# Altium PCB Export_PCB.PcbDoc (part 6 of 7)
Units mm, origin at the board's own origin, x right, y up, seen from the top; angles counter-clockwise.
Board outline 93 x 90 mm, 6 copper layers (Top_1, GND_2, SIGNAL_3, PWR_4, GND_5, Bottom_6), stack 1.606 mm thick; 470 components, 374 nets, 2145 pads, 1031 vias.
Unrouted connection lines stored in the file: 451.
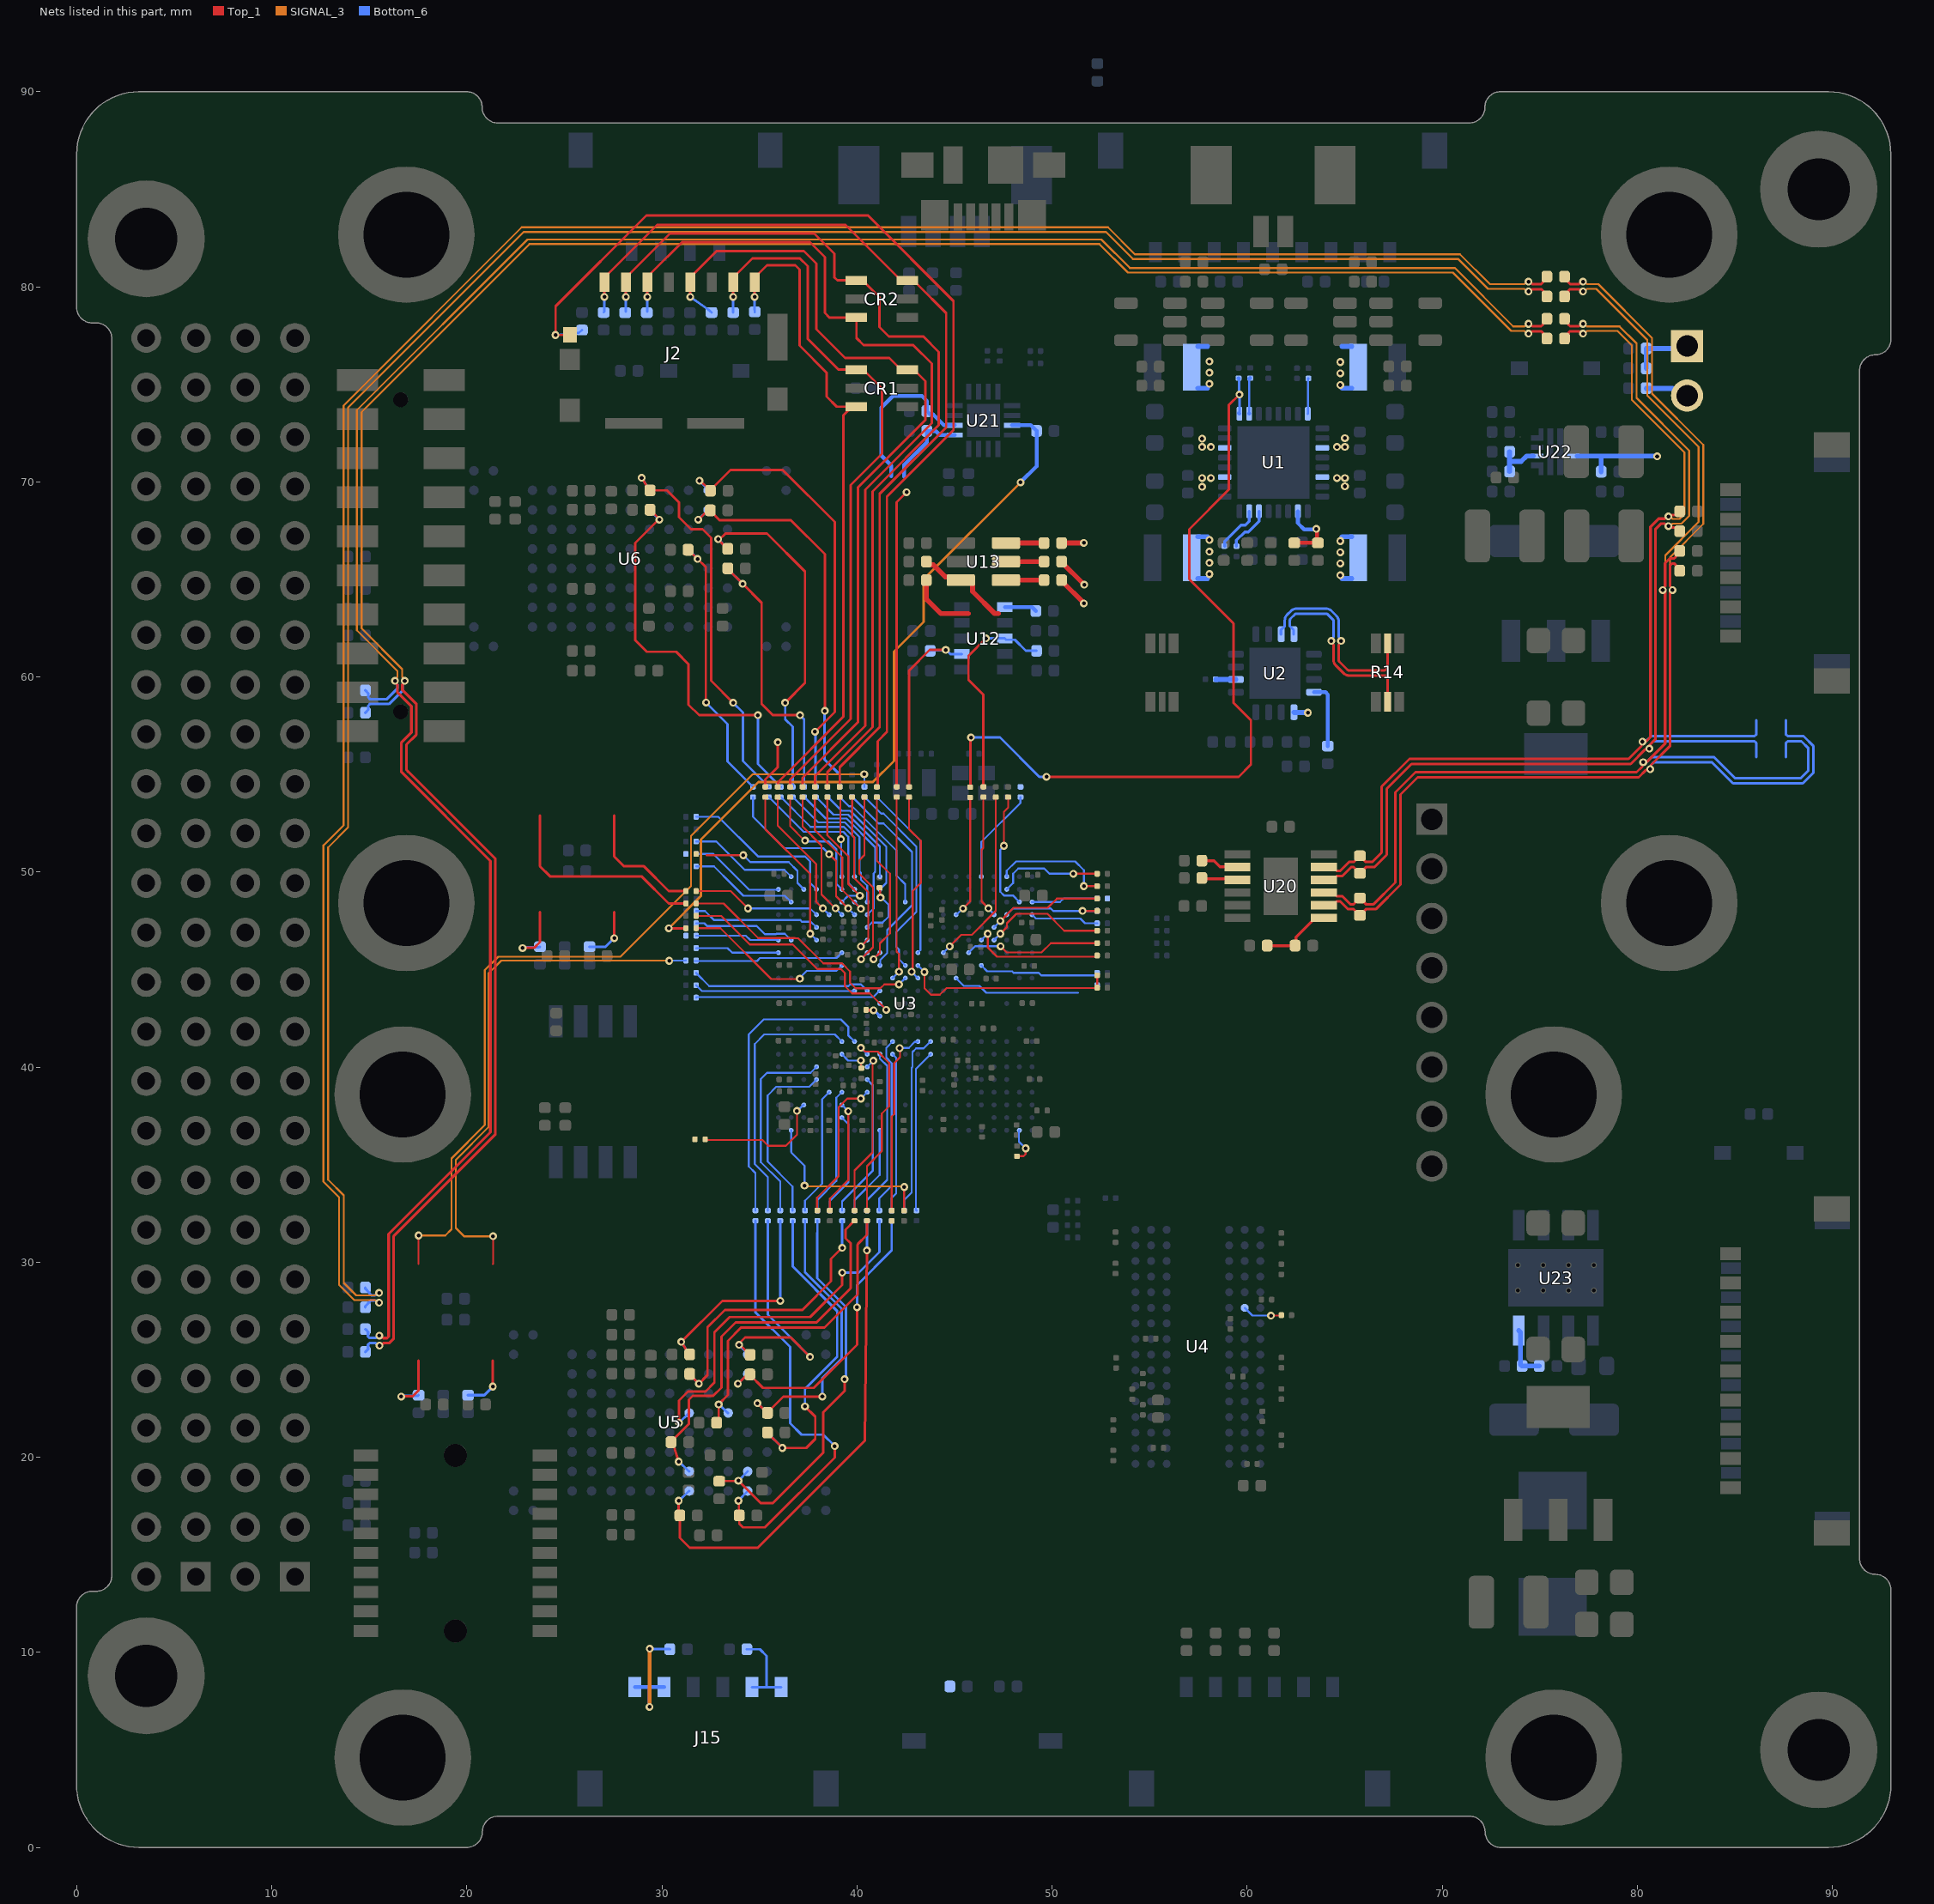
[diagram p8: the nets of this part, all layers, seen from the top]

## Via types
v1: diameter 0.4, hole 0.2, Top_1 to Bottom_6, 870 vias
v2: diameter 0.4, hole 0.2, Top_1 to Bottom_6, tented both sides, 160 vias
v3: diameter 0.4, hole 0.15, Top_1 to Bottom_6, 1 vias

## Nets (pads, with @x,y where several pads share a name; then routed paths per layer and width w, separated by ;. In a path a pad name is that pad's centre, name@x,y a point inside that pad or via, vN(x,y) a via of type N, cw(c..) or ccw(c..) an arc to the next point about the centre after c; other vN are vias at no path point) (continued)
NetJP3_1: JP3.1 R206.1 R208.1 | length 3.2
  Bottom_6 w0.254: R206.1@80.46,75.819 R208.1@80.46,76.835 82.427,76.835 JP3.1@82.554,76.962
NetJP3_2: JP3.2 R49.1 | length 2.2
  Bottom_6 w0.254: R49.1@80.46,74.794 81.805,74.794 82.176,74.422 JP3.2@82.554,74.422
NetL1_1: L1.1 U1.11 | length 1
  Bottom_6 w0.254: v2@64.873,74.795 L1.1@65.367,74.795 ; 64.873,76.941 L1.1@65.367,76.941
  other v2: 64.607,71.794 65.016,71.794 65.016,72.243 64.781,74.965 64.781,75.565 64.781,76.14
NetL2_1: L2.1 U1.14 | length 1
  Bottom_6 w0.254: v2@64.873,65.045 L2.1@65.367,65.045 ; 64.873,67.191 L2.1@65.367,67.191
  other v2: 64.781,65.215 64.781,65.815 64.781,66.39 64.781,66.965 65.016,69.772 64.607,70.196 65.016,70.196
NetL3_1: L3.1 U1.27 | length 1
  Bottom_6 w0.254: L3.1@57.479,65.045 57.972,65.045 ; L3.1@57.479,67.191 v2@57.972,67.191
  other v2: 58.065,65.272 58.065,65.847 58.065,66.422 58.065,67.022 57.696,69.743 57.696,70.193 58.146,70.193
NetL4_1: L4.1 U1.30 | length 1
  Bottom_6 w0.254: L4.1@57.479,74.795 57.972,74.795 ; L4.1@57.479,76.941 57.972,76.941
  other v2: 57.696,71.79 58.146,71.79 57.696,72.215 58.065,75.022 58.065,75.597 58.065,76.172
NetR1_2: R1.2 U1.22 | length 2.4
  Bottom_6 w0.15: R1.2@59.456,66.7 59.456,67.01 59.883,67.437 60.071,67.437 60.606,67.972 U1.22@60.606,68.493
NetR2_2: R2.2 U1.23 | length 2.4
  Bottom_6 w0.15: R2.2@58.842,66.703 58.848,66.71 58.848,66.95 59.688,67.789 59.915,67.789 60.106,67.98 U1.23@60.106,68.493
NetR3_2: R3.2 U1.8 | length 1.8
  Bottom_6 w0.127: U1.8@63.106,73.493 63.123,73.511 63.123,75.285 R3.2@63.141,75.303
NetR8_1: R8.1 R78.2 U1.1 | length 41.2
  Top_1 w0.127: R78.2@45.803,54.351 45.825,54.373 45.825,56.874 v1(45.847,56.896) ; v1(49.715,54.878) 59.565,54.878 60.198,55.511 60.198,57.785 59.309,58.674 59.309,62.738 57.035,65.012 57.035,67.578 59.055,69.597 59.055,73.924 v1(59.606,74.475)
  Bottom_6 w0.127: v1(45.847,56.896) 47.335,56.896 49.353,54.878 v1(49.715,54.878) ; U1.1@59.584,73.515 59.606,73.536 v1(59.606,74.475) 59.585,74.497 R8.1@59.585,75.289
  Bottom_6 w0.2: R8.1@59.563,75.311 R8.1@59.584,75.29 ; U1.1@59.584,73.515 U1.1@59.606,73.493
NetR9_1: R9.1 U2.16 | length 3.4
  Bottom_6 w0.2: U2.16@63.427,59.217 64.018,59.217 64.135,59.099 R9.1@64.135,56.457
NetR10_1: R74.2 U2.1 | length 0.7
  Bottom_6 w0.25: U2.1@62.402,58.192 62.414,58.179 63.106,58.179 v1(63.119,58.166)
NetR11_1: R11.1 U2.6 | length 1
  Bottom_6 w0.254: R11.1@58.393,59.867 U2.6@59.427,59.867
NetR12_1: R12.1 R13.2 U1.18 | length 3.6
  Top_1 w0.2: R13.2@62.42,66.871 62.583,66.871 63.464,66.871 R12.1@63.627,66.871 63.608,67.008 63.582,67.035 63.582,67.547 v1(63.544,67.585)
  Bottom_6 w0.2: U1.18@62.606,68.493 62.606,67.881 62.925,67.562 63.52,67.562 v1(63.544,67.585)
NetR21_1: R21.1 R22.2 U3.H10 | length 10.9
  Top_1 w0.1: v1(43.463,44.878) 43.463,44.042 43.797,43.708 44.247,43.708 44.595,44.055 52.177,44.055 ; R22.2@52.316,44.069 R21.1@52.316,44.704
  Bottom_6 w0.1: U3.H10@43.128,45.212 v1(43.463,44.878)
NetR67_2: R67.2 R169.2 | length 1.7
  Top_1 w0.254: R169.2@50.488,64.963 50.488,64.932 51.635,63.785 v1(51.635,63.768)
NetR87_2: R87.2 | length 27.7
  Top_1 w0.1: 21.336,29.902 21.347,29.913 v1(21.347,31.33)
  SIGNAL_3 w0.1: v1(21.347,31.33) 19.858,31.33 19.434,31.754 19.434,35.242 21.127,36.935 21.127,44.81 21.774,45.457 30.366,45.457 v1(30.375,45.449)
  Bottom_6 w0.1: v1(30.375,45.449) 30.383,45.458 31.225,45.458 R87.2@31.234,45.466
NetR88_2: R88.2 R207.1 U22.9 | length 4.9
  Bottom_6 w0.25: R207.1@78.154,70.521 78.154,71.304 78.171,71.32
  Bottom_6 w0.254: U22.9@76.917,71.32 78.171,71.32 81.008,71.32 v2(81.021,71.307)
NetR89_2: R89.2 | length 43.1
  Top_1 w0.1: 17.526,29.902 v1(17.526,31.369)
  SIGNAL_3 w0.1: v1(17.526,31.369) 18.896,31.369 19.22,31.693 19.22,35.323 20.927,37.03 20.927,44.971 21.614,45.657 27.877,45.657 31.496,49.276 31.496,51.857 34.653,55.013 v1(40.373,55.013)
  Bottom_6 w0.1: v1(40.373,55.013) 40.386,55 R89.2@40.386,54.364
NetR91_2: R91.2 | length 6.5
  Top_1 w0.134: 27.559,52.889 27.559,50.8 28.067,50.292 29.083,50.292 30.353,49.022 R91.2@31.234,49.022
NetR93_2: R93.2 | length 10.9
  Top_1 w0.134: 23.749,52.889 23.749,50.292 24.264,49.777 28.957,49.777 30.347,48.387 R93.2@31.234,48.387
NetR96_2: R96.2 R164.2 U12.3 | length 11.2
  Top_1 w0.125: R96.2@46.482,54.364 46.482,59.093 45.72,59.855 45.72,61.087 v1(46.609,61.976)
  Bottom_6 w0.125: v1(46.609,61.976) U12.3@47.582,61.976 47.65,61.908 48.096,61.908 48.663,61.341 R164.2@49.207,61.341
NetR98_2: R98.2 R197.1 U21.15 | length 39
  Top_1 w0.125: v1(30.353,47.117) R98.2@31.234,47.117
  SIGNAL_3 w0.125: v1(30.353,47.117) 32.004,48.768 32.004,51.67 34.944,54.61 40.815,54.61 41.901,55.696 41.901,61.294 43.42,62.813 43.42,65.01 v1(48.387,69.977)
  Bottom_6 w0.2: U21.15@47.952,72.902 48.914,72.902 49.03,72.785 49.035,72.785 49.207,72.613 R197.1@49.207,72.608 49.207,70.797 v1(48.387,69.977)
NetR99_2: R99.2 R198.2 U21.6 | length 11.2
  Top_1 w0.125: R99.2@35.306,54.364 35.306,54.737 35.941,55.372 v1(35.941,56.655)
  Bottom_6 w0.2: 41.758,70.282 41.758,70.841 41.255,71.344 41.255,73.803 41.848,74.397 43.332,74.397 43.582,74.147 R198.2@43.582,73.625 43.582,73.62 43.754,73.448 43.914,73.448 44.454,72.908 45.006,72.908 U21.6@45.012,72.902
NetR100_2: R100.2 R199.2 U21.5 | length 19.6
  Top_1 w0.125: R100.2@42.037,54.364 42.037,68.961 v1(42.545,69.469)
  Bottom_6 w0.2: 42.423,70.269 42.423,70.871 43.582,72.03 R199.2@43.582,72.609 43.586,72.605 44.04,72.605 44.243,72.402 U21.5@45.012,72.402
NetR111_1: R111.1 U3.B19 | length 6.1
  Top_1 w0.1: 32.301,50.862 v1(34.178,50.862)
  Bottom_6 w0.1: v1(34.178,50.862) 34.528,50.512 36.503,50.512 36.953,50.062 36.953,49.437 U3.B19@37.278,49.112
NetR113_1: R113.1 U3.F20 | length 5.2
  Bottom_6 w0.1: R113.1@31.758,47.371 32.178,47.371 32.312,47.237 34.853,47.237 35.278,46.812 35.853,46.812 35.876,46.835 36.305,46.835 U3.F20@36.628,46.512
NetR125_2: R125.2 R165.2 U12.7 | length 10
  Top_1 w0.125: R125.2@42.672,54.364 42.672,60.325 43.731,61.384 v1(44.552,61.384)
  Bottom_6 w0.125: R165.2@43.757,61.341 43.779,61.363 44.53,61.363 v1(44.552,61.384) 44.586,61.384 44.794,61.176 U12.7@45.382,61.176
NetR126_2: R126.2 R168.2 | length 1.7
  Top_1 w0.254: R168.2@50.488,65.913 50.488,65.892 51.65,64.73 v1(51.654,64.73)
NetR128_1: R128.1 U3.AA2 | length 1.8
  Top_1 w0.1: R128.1@48.228,35.437 48.541,35.437 48.646,35.542 48.646,35.828 v1(48.651,35.833)
  Bottom_6 w0.1: U3.AA2@48.328,36.762 48.303,36.737 48.303,36.181 v1(48.651,35.833)
NetR131_2: R131.2 U4.L8 | length 2.1
  Top_1 w0.1: v1(61.226,27.262) 61.687,27.262 R131.2@61.756,27.283
  Bottom_6 w0.1: U4.L8@59.878,27.662 60.278,27.262 v1(61.226,27.262) v1@61.278,27.262
NetR161_1: 
NetR162_1: 
NetR163_1: 
NetR166_2: R166.2 U12.1 | length 1.7
  Bottom_6 w0.2: U12.1@47.582,63.576 48.976,63.576 49.168,63.383 R166.2@49.168,63.379
NetR167_1: R167.1 U13.6 | length 2
  Top_1 w0.254: U13.6@47.637,66.863 R167.1@49.588,66.863
NetR168_1: R168.1 U13.5 | length 2
  Top_1 w0.254: U13.5@47.637,65.913 R168.1@49.588,65.913
NetR169_1: R169.1 U13.4 | length 2
  Top_1 w0.254: U13.4@47.637,64.963 R169.1@49.588,64.963
NetR170_1: R170.1 SB1.1 | length 3.4
  Top_1 w0.254: R170.1@43.561,64.958 43.561,63.989 44.304,63.246 SB1.1@45.707,63.246
NetR171_1: R171.1 SB1.2 U13.3 | length 5
  Top_1 w0.254: R171.1@43.561,65.913 43.561,65.894 43.708,65.746 43.919,65.746 44.534,65.131 45.159,65.131 U13.3@45.327,64.963 45.757,64.963 45.925,64.795 45.925,64.387 47.066,63.246 SB1.2@47.244,63.246
NetR179_2: R179.2 | length 3.5
  Top_1 w0.134: v1(16.637,23.114) 16.651,23.128 17.233,23.128 17.526,23.422 17.526,24.962
  Bottom_6 w0.134: v1(16.637,23.114) 16.672,23.149 17.491,23.149 R179.2@17.526,23.183
NetR181_1: R181.1 | length 2.8
  Top_1 w0.134: v1(21.336,23.622) 21.336,24.962
  Bottom_6 w0.134: R181.1@20.066,23.183 20.897,23.183 v1(21.336,23.622)
NetR185_2: R185.2 | length 3.5
  Top_1 w0.134: v1(22.86,46.101) 22.874,46.115 23.456,46.115 23.749,46.409 23.749,47.949
  Bottom_6 w0.134: v1(22.86,46.101) 22.895,46.136 23.714,46.136 R185.2@23.749,46.17
NetR187_1: R187.1 | length 2.8
  Top_1 w0.134: v1(27.559,46.609) 27.559,47.949
  Bottom_6 w0.134: R187.1@26.289,46.17 27.12,46.17 v1(27.559,46.609)
NetR191_1: R191.1 R193.1 U20.7 | length 3.7
  Top_1 w0.15: R193.1@61.029,46.228 R191.1@62.459,46.228 62.502,46.271 62.502,46.665 63.487,47.65 U20.7@63.938,47.65
NetR203_2: R203.2 R204.1 U22.2 | length 2.4
  Bottom_6 w0.254: R203.2@73.454,70.53 73.454,71.045 ; R204.1@73.454,71.545 73.454,71.045 ; U22.2@74.674,71.323 74.596,71.323 74.594,71.326 74.326,71.326 74.045,71.045 73.454,71.045
NetR210_2: R210.2 R211.1 U23.4 | length 2.8
  Bottom_6 w0.254: U23.4@73.924,26.495 74.01,26.41 74.01,24.767 R210.2@74.095,24.681 R211.1@74.973,24.681
NRST: C29.1 R7.1 R18.2 R167.2 R188.2 U1.2 U3.D3 | length 8.6
  Top_1 w0.1: v1(51.562,48.006) C29.1@52.316,48.006
  Top_1 w0.254: R167.2@50.488,66.863 50.494,66.869 51.622,66.869 v1(51.628,66.876)
  Bottom_6 w0.1: U3.D3@47.678,47.812 48,48.134 49.936,48.134 50.064,48.006 v1(51.562,48.006) R18.2@52.316,48.006
  Bottom_6 w0.127: U1.2@60.11,73.497 R7.1@60.11,75.279
  Bottom_6 w0.2: U1.2@60.106,73.493 U1.2@60.11,73.497 ; R7.1@60.11,75.279 60.147,75.317 R7.1@60.16,75.317
NRST_OUT: R19.2 U3.E4 | length 5.9
  Top_1 w0.1: v1(47.353,47.487) 48.031,48.165 49.781,48.165 50.257,48.641 R19.2@52.316,48.641
  Bottom_6 w0.1: U3.E4@47.028,47.162 v1(47.353,47.487)
PA0: R31.1 U3.U18 | length 9.3
  Bottom_6 w0.1: R31.1@36.703,32.647 36.703,33.879 35.418,35.163 35.418,38.541 35.866,38.989 37.555,38.989 U3.U18@37.928,39.362
PA1: R32.1 U3.V17 | length 6.6
  Bottom_6 w0.1: R32.1@37.338,32.647 37.338,33.147 38.221,34.03 38.221,38.355 U3.V17@38.578,38.712
PA2: R34.1 U3.R14 | length 10.3
  Top_1 w0.1: v1(40.203,40.987) 40.218,40.987 40.412,40.794 41.066,40.794 41.649,40.211 41.649,37.994 41.275,37.619 41.275,35.687 40.513,34.925 R34.1@40.513,32.647
  Bottom_6 w0.1: v1(40.203,40.987) U3.R14@40.528,40.662
PA3: R35.1 U3.T18 | length 10.3
  Bottom_6 w0.1: R35.1@36.068,32.647 36.068,34.138 35.075,35.131 35.075,39.391 35.391,39.707 37.623,39.707 U3.T18@37.928,40.012
PA4: R37.1 U3.P16 | length 13.6
  Bottom_6 w0.1: R37.1@35.433,32.647 35.433,34.36 34.761,35.031 34.761,41.185 35.251,41.674 38.866,41.674 U3.P16@39.228,41.312
PA5: R38.1 U3.V16 | length 6.6
  Bottom_6 w0.1: R38.1@37.973,32.647 37.973,33.184 38.946,34.157 38.946,38.43 U3.V16@39.228,38.712
PA6: R39.1 U3.T14 | length 8.5
  Top_1 w0.1: R39.1@39.878,32.647 39.878,34.701 40.802,35.625 40.802,40.286 v1(40.844,40.328)
  Bottom_6 w0.1: U3.T14@40.528,40.012 v1(40.844,40.328)
PA7: R41.1 U3.P15 | length 15.6
  Bottom_6 w0.1: R41.1@34.798,32.647 34.798,34.569 34.454,34.913 34.454,41.675 35.222,42.443 39.178,42.443 39.553,42.068 39.553,41.637 U3.P15@39.878,41.312
PA8: R44.1 U3.R13 | length 8.6
  Bottom_6 w0.1: R44.1@40.513,32.647 40.513,33.183 41.551,34.221 41.551,40.064 41.178,40.437 U3.R13@41.178,40.662
PA9: R46.1 U3.U14 | length 7.5
  Bottom_6 w0.1: R46.1@39.243,32.647 39.243,33.119 40.807,34.682 40.807,39.083 U3.U14@40.528,39.362
PA10: R48.1 U3.R12 | length 8.2
  Bottom_6 w0.1: R48.1@41.783,32.647 41.783,33.296 42.015,33.528 42.015,40.475 U3.R12@41.828,40.662
PA11: R50.1 U3.P12 | length 9.2
  Bottom_6 w0.1: R50.1@41.148,32.647 41.148,33.272 41.785,33.909 41.785,40.205 41.503,40.487 41.503,40.987 U3.P12@41.828,41.312
PA14: R55.1 U3.V14 | length 7.6
  Top_1 w0.1: R55.1@37.973,32.647 37.948,32.673 37.948,33.299 39.065,34.417 39.065,37.944 39.508,38.387 v1(40.203,38.387)
  Bottom_6 w0.1: v1(40.203,38.387) U3.V14@40.528,38.712
PA17: R56.1 U3.R9 | length 8.3
  Bottom_6 w0.1: R56.1@43.053,32.647 43.02,32.681 43.02,39.904 U3.R9@43.778,40.662
PA18: R58.1 U3.W16 | length 5.9
  Top_1 w0.1: R58.1@38.608,32.647 38.608,33.265 39.553,34.21 v1(39.553,37.737)
  Bottom_6 w0.1: U3.W16@39.228,38.062 v1(39.553,37.737)
PA21: R59.1 U3.W19 | length 6.8
  Top_1 w0.1: R59.1@32.222,36.3 32.26,36.262 35.153,36.262 35.444,35.971 36.357,35.971 36.927,36.541 36.927,37.75 v1(36.923,37.755)
  Bottom_6 w0.1: v1(36.923,37.755) 36.947,37.755 37.254,38.062 U3.W19@37.278,38.062
PA22: R61.1 U3.P10 | length 9.6
  Top_1 w0.1: R61.1@41.783,32.639 41.783,37.465 41.911,37.593 41.911,40.206 42.211,40.506 42.211,40.948 v1(42.187,40.972)
  Bottom_6 w0.1: v1(42.187,40.972) 42.198,40.983 42.656,40.983 42.962,41.289 43.105,41.289 U3.P10@43.128,41.312
PA23: R63.1 U3.AA20 | length 9.5
  Top_1 w0.1: R63.1@42.418,32.639 42.42,32.641 42.42,33.853 v1(42.422,33.856)
  SIGNAL_3 w0.1: v1(37.315,33.924) 37.349,33.89 42.388,33.89 v1(42.422,33.856)
  Bottom_6 w0.1: U3.AA20@36.628,36.762 36.628,35.676 ccw(c36.728,35.676) 36.657,35.606 37.32,34.943 37.32,33.929 v1(37.315,33.924)
PA24: R65.1 U3.P9 | length 9.4
  Bottom_6 w0.1: R65.1@42.418,32.647 42.418,33.189 42.799,33.57 42.799,39.963 42.848,40.012 42.848,40.771 43.039,40.962 43.419,40.962 U3.P9@43.769,41.312
PA25: R67.1 U3.B21 | length 5
  Bottom_6 w0.1: R67.1@31.758,50.927 32.638,50.927 34.478,49.087 35.953,49.087 U3.B21@35.978,49.112
PA26: R69.1 U3.K14 | length 9.2
  Bottom_6 w0.1: R69.1@31.758,44.831 31.758,44.819 32.431,44.146 39.562,44.146 39.653,44.237 40.203,44.237 U3.K14@40.528,43.912
PA28: R72.1 U3.L13 | length 12.6
  Top_1 w0.1: R72.1@31.758,47.752 33.041,47.752 34.51,46.282 36.712,46.282 37.967,45.027 39.174,45.027 39.385,44.816 39.385,44.149 39.753,43.781 40.659,43.781 v1(41.503,42.937)
  Bottom_6 w0.1: U3.L13@41.178,43.262 v1(41.503,42.937)
PA30: R73.1 U3.K15 | length 8.3
  Bottom_6 w0.1: R73.1@31.758,44.196 31.758,44.194 31.845,44.108 31.847,44.108 32.06,43.895 39.861,43.895 U3.K15@39.878,43.912
PA31: R74.1 U3.F21 | length 4.3
  Bottom_6 w0.1: R74.1@31.758,46.736 34.304,46.736 34.528,46.512 U3.F21@35.978,46.512
PB1: R33.1 U3.G21 | length 4.3
  Bottom_6 w0.1: R33.1@31.758,46.101 33.364,46.101 33.603,45.862 U3.G21@35.978,45.862
PB6: R40.1 U3.K13 | length 9.6
  Bottom_6 w0.1: R40.1@31.758,43.561 31.786,43.589 40.831,43.589 41.154,43.912 U3.K13@41.178,43.912
PB7: R42.1 U3.C20 | length 5.6
  Bottom_6 w0.1: R42.1@31.758,50.292 32.673,50.292 33.158,49.807 33.216,49.749 34.178,48.787 36.303,48.787 U3.C20@36.628,48.462
PB21: R60.1 U3.D15 | length 9.4
  Top_1 w0.1: v1(38.578,50.912) 38.928,50.562 38.928,48.762 v1(39.553,48.137)
  Bottom_6 w0.1: R60.1@34.671,53.84 34.671,52.848 34.665,52.842 36.285,51.222 38.268,51.222 v1(38.578,50.912) ; v1(39.553,48.137) U3.D15@39.878,47.812
PB22: R62.1 U3.C14 | length 7.8
  Bottom_6 w0.1: R62.1@36.703,53.84 36.716,53.84 38.015,52.54 39.384,52.54 40.132,51.792 40.132,50.043 40.212,49.963 40.212,49.61 40.528,49.294 U3.C14@40.528,48.462
PB23: R64.1 U3.D14 | length 8.3
  Bottom_6 w0.1: R64.1@37.293,53.84 37.306,53.84 38.405,52.74 39.467,52.74 40.935,51.273 40.935,50.009 40.853,49.928 40.853,48.137 U3.D14@40.528,47.812
PB24: R66.1 U3.B15 | length 7.8
  Bottom_6 w0.1: R66.1@35.474,53.843 35.486,53.843 37.272,52.057 39.302,52.057 39.553,51.806 39.553,49.437 U3.B15@39.878,49.112
PB25: R68.1 U3.A13 | length 5.9
  Bottom_6 w0.1: R68.1@37.893,53.84 37.906,53.84 38.805,52.94 39.55,52.94 41.178,51.312 U3.A13@41.178,49.762
PB26: R70.1 U3.A15 | length 6.6
  Bottom_6 w0.1: R70.1@36.093,53.838 36.105,53.838 37.626,52.316 39.325,52.316 39.878,51.764 U3.A15@39.878,49.762
PB27: R71.1 U3.C11 | length 6.9
  Bottom_6 w0.1: R71.1@39.116,53.848 39.118,53.848 39.216,53.75 39.216,53.748 39.596,53.368 39.758,53.368 42.026,51.101 42.026,49.825 42.478,49.373 U3.C11@42.478,48.462
PC2: R78.1 U3.D7 | length 6.3
  Top_1 w0.1: v1(45.435,48.128) 45.803,48.496 R78.1@45.803,53.826
  Bottom_6 w0.1: U3.D7@45.078,47.812 45.099,47.812 45.414,48.128 v1(45.435,48.128)
PC3: R80.1 U3.G8 | length 9.4
  Top_1 w0.1: v1(44.753,46.187) 45.348,46.782 45.89,46.782 47.117,48.008 R80.1@47.117,53.84
  Bottom_6 w0.1: U3.G8@44.428,45.862 v1(44.753,46.187)
PC4: R82.1 U3.C2 | length 6.2
  Top_1 w0.1: v1(47.533,51.346) 47.533,53.086 47.752,53.304 R82.1@47.752,53.84
  Bottom_6 w0.1: v1(47.533,51.346) 47.533,51.325 47.345,51.138 47.345,48.986 47.532,48.799 47.991,48.799 U3.C2@48.328,48.462
PC11: R88.1 U3.C1 | length 3.4
  Bottom_6 w0.1: U3.C1@48.978,48.462 50.41,48.462 50.589,48.641 R88.1@52.316,48.641
PC12: R90.1 U3.H5 | length 6.2
  Bottom_6 w0.1: U3.H5@46.378,45.212 46.678,44.912 47.958,44.912 48.033,44.837 49.314,44.837 49.447,44.704 R90.1@52.324,44.704
PC13: R92.1 U3.D1 | length 3.5
  Bottom_6 w0.1: U3.D1@48.978,47.812 49.178,47.612 51.448,47.612 51.689,47.371 R92.1@52.315,47.371
PC14: R94.1 U3.J7 | length 6.6
  Bottom_6 w0.1: U3.J7@45.078,44.562 45.474,44.166 46.274,44.166 46.628,43.812 51.336,43.812
PC17: R96.1 U3.D4 | length 6.3
  Top_1 w0.1: R96.1@46.482,53.84 46.482,51.236 46.386,51.14 46.386,48.493 v1(46.743,48.137)
  Bottom_6 w0.1: v1(46.743,48.137) 46.743,48.117 47.028,47.832 U3.D4@47.028,47.812
PC22: R101.1 U3.F4 | length 6.3
  Top_1 w0.1: v1(47.353,46.837) 47.693,47.177 47.693,47.377 48.17,47.854 49.762,47.854 50.626,46.99 R101.1@52.316,46.99
  Bottom_6 w0.1: U3.F4@47.028,46.512 v1(47.353,46.837)
PC23: R102.1 U3.A3 | length 6.1
  Top_1 w0.1: v1(51.634,49.279) 51.635,49.277 52.304,49.277 R102.1@52.309,49.282
  Bottom_6 w0.1: U3.A3@47.678,49.762 47.678,50.065 48.159,50.546 51.181,50.546 51.634,50.093 v1(51.634,49.279)
PC24: R103.1 U3.F5 | length 7
  Top_1 w0.1: v1(46.703,46.837) 46.703,46.139 47.182,45.66 52.256,45.66 R103.1@52.316,45.72
  Bottom_6 w0.1: U3.F5@46.378,46.512 v1(46.703,46.837)
PC25: R104.1 U3.B3 | length 5.5
  Top_1 w0.1: v1(51.092,49.911) R104.1@52.316,49.911
  Bottom_6 w0.1: U3.B3@47.678,49.112 48.003,49.437 48.003,49.915 48.271,50.184 49.597,50.184 49.869,49.911 v1(51.092,49.911)
PC26: R105.1 U3.G6 | length 7.1
  Top_1 w0.1: v1(47.361,46.193) 47.676,45.878 49.463,45.878 49.939,46.354 R105.1@52.315,46.355
  Bottom_6 w0.1: U3.G6@45.728,45.862 46.059,46.193 v1(47.361,46.193)
PC27: R106.1 U3.C15 | length 7.2
  Top_1 w0.1: R106.1@37.846,53.84 37.846,52.147 39.247,50.746 39.247,49.075 v1(40.202,48.12)
  Bottom_6 w0.1: U3.C15@39.878,48.462 39.878,48.453 40.202,48.129 v1(40.202,48.12)
PC28: R107.1 U3.D16 | length 6.9
  Top_1 w0.1: R107.1@37.211,53.84 37.211,52.332 38.188,51.355 38.188,48.852 v1(38.903,48.137)
  Bottom_6 w0.1: v1(38.903,48.137) U3.D16@39.228,47.812
PC29: R108.1 U3.B16 | length 6.5
  Top_1 w0.1: R108.1@36.576,53.84 36.576,52.357 37.319,51.614 v1(37.34,51.614)
  Bottom_6 w0.1: v1(37.34,51.614) 37.385,51.568 38.553,51.568 38.94,51.181 38.94,49.4 U3.B16@39.228,49.112
PC30: R110.1 U3.D17 | length 7.1
  Top_1 w0.1: R110.1@35.941,53.84 35.941,52.379 37.912,50.408 37.912,48.478 v1(38.253,48.137)
  Bottom_6 w0.1: v1(38.253,48.137) U3.D17@38.578,47.812
PC31: R112.1 U3.A16 | length 4.1
  Top_1 w0.1: R112.1@39.116,53.84 39.148,53.808 39.148,51.716 v1(39.18,51.684)
  Bottom_6 w0.1: v1(39.18,51.684) 39.2,51.664 39.2,49.79 U3.A16@39.228,49.762
PD0: R76.1 U3.C16 | length 6.8
  Top_1 w0.1: R76.1@38.481,53.84 38.481,51.882 39.564,50.799 39.564,49.375 v1(40.152,48.787)
  Bottom_6 w0.1: U3.C16@39.228,48.462 39.553,48.787 v1(40.152,48.787)
PD2: R79.1 U3.G13 | length 9.4
  Top_1 w0.1: v1(40.851,45.533) 41.176,45.858 41.176,46.338 41.692,46.854 41.692,49.91 41.021,50.581 R79.1@41.021,53.84
  Bottom_6 w0.1: v1@40.851,45.534 U3.G13@41.178,45.862
PD3: R81.1 U3.B18 | length 8.4
  Bottom_6 w0.1: R81.1@31.758,52.832 32.893,52.832 34.924,50.801 37.339,50.801 37.603,50.537 37.603,49.437 U3.B18@37.928,49.112
PD6: R83.1 U3.G10 | length 9
  Bottom_6 w0.1: R83.1@41.021,53.84 41.023,53.84 41.121,53.742 41.121,53.74 43.255,51.605 43.255,45.996 43.128,45.868 U3.G10@43.128,45.862
PD7: R84.1 U3.A20 | length 5.6
  Bottom_6 w0.1: R84.1@31.758,51.562 32.796,51.562 34.246,50.112 36.278,50.112 U3.A20@36.628,49.762
PD8: R85.1 U3.G14 | length 9.4
  Top_1 w0.1: v1(40.213,45.533) 40.82,46.14 40.82,49.216 40.12,49.915 40.12,50.602 40.386,50.868 R85.1@40.386,53.84
  Bottom_6 w0.1: v1(40.213,45.533) 40.213,45.54 40.528,45.855 U3.G14@40.528,45.862
PD9: R86.1 U3.F14 | length 8.6
  Top_1 w0.1: R86.1@39.751,53.848 39.751,51.875 39.854,51.772 39.854,49.7 40.585,48.969 40.585,46.569 v1(40.203,46.187)
  Bottom_6 w0.1: v1(40.203,46.187) U3.F14@40.528,46.512
PD10: R87.1 U3.G16 | length 7.7
  Bottom_6 w0.1: R87.1@31.68,45.441 34.882,45.441 35.027,45.587 38.953,45.587 U3.G16@39.228,45.862
PD11: R89.1 U3.H11 | length 10.4
  Bottom_6 w0.1: R89.1@40.386,53.84 40.399,53.84 41.247,52.991 41.362,52.991 43.048,51.305 43.048,47.954 42.016,46.921 42.016,46.174 42.153,46.037 42.153,45.537 U3.H11@42.478,45.212
PD12: R91.1 U3.D18 | length 6.7
  Top_1 w0.1: R91.1@31.758,49.022 33.528,49.022 v1(34.417,48.133)
  Bottom_6 w0.1: v1(34.417,48.133) 34.421,48.137 37.603,48.137 U3.D18@37.928,47.812
PD13: R93.1 U3.J11 | length 13.1
  Top_1 w0.1: R93.1@31.758,48.387 33.164,48.387 34.936,46.615 36.824,46.615 36.83,46.609 36.985,46.609 38.281,45.313 39.237,45.313 39.648,44.902 39.648,44.325 39.936,44.036 41.201,44.036 41.402,44.237 v1(42.153,44.237)
  Bottom_6 w0.1: v1(42.153,44.237) U3.J11@42.478,44.562
PD16: R95.1 U3.E18 | length 6.5
  Bottom_6 w0.1: R95.1@31.758,48.006 32.209,48.006 32.682,47.533 37.107,47.533 37.188,47.452 37.638,47.452 U3.E18@37.928,47.162
PD17: R97.1 U3.H13 | length 10.7
  Bottom_6 w0.1: R97.1@39.751,53.84 39.764,53.84 41.113,52.49 41.361,52.49 42.828,51.024 42.828,48.297 41.554,47.023 41.554,45.977 41.553,45.976 41.553,45.848 41.201,45.496 41.201,45.235 U3.H13@41.178,45.212
PD18: R98.1 U3.H16 | length 8.9
  Top_1 w0.1: R98.1@31.758,47.117 33.006,47.117 35.611,44.512 37.053,44.512 v1(37.074,44.533)
  Bottom_6 w0.1: v1(37.074,44.533) 37.074,44.578 37.426,44.93 38.946,44.93 U3.H16@39.228,45.212
PD19: R99.1 U3.F18 | length 8.4
  Top_1 w0.1: R99.1@35.306,53.84 35.306,52.197 37.603,49.9 v1(37.603,46.837) v1@37.596,46.837
  Bottom_6 w0.1: v1(37.603,46.837) U3.F18@37.928,46.512
PD20: R100.1 U3.J12 | length 9.5
  Top_1 w0.1: R100.1@42.037,53.84 42.037,45.922 42.153,45.806 v1(42.153,44.887)
  Bottom_6 w0.1: U3.J12@41.828,44.562 v1(42.153,44.887)
PE4: R121.1 U3.AA13 | length 4.7
  Bottom_6 w0.1: R121.1@39.878,32.647 39.878,33.186 41.166,34.473 41.166,36.749 U3.AA13@41.178,36.762
PE9: R123.1 U3.Y16 | length 5.3
  Bottom_6 w0.1: R123.1@38.608,32.647 38.608,33.139 39.553,34.084 39.553,37.087 U3.Y16@39.228,37.412
PIOBU0: R125.1 U3.J10 | length 9.9
  Top_1 w0.1: R125.1@42.672,53.84 42.672,52.197 43.275,51.594 43.275,49.437 42.86,49.023 42.86,45.096 42.86,44.944 v1(42.803,44.887)
  Bottom_6 w0.1: v1(42.803,44.887) U3.J10@43.128,44.562
PIOBU1: R126.1 U3.A5 | length 4.9
  Bottom_6 w0.1: U3.A5@46.378,49.762 46.378,51.541 48.387,53.55 R126.1@48.387,53.84
QSPI0_CAL: R23.2 U3.M13 | length 0.8
  Top_1 w0.15: R23.2@40.465,42.937 40.48,42.923 40.843,42.923 v1(40.853,42.912)
  Bottom_6 w0.15: v1(40.853,42.912) 40.878,42.912 U3.M13@41.178,42.612
RS422_DE: R61.2 R196.2 U20.3 | length 1.9
  Top_1 w0.15: R196.2@57.679,49.692 57.725,49.647 59.46,49.647 U20.3@59.506,49.601
RS422_R\E\: R59.2 R192.1 U20.2 | length 2
  Top_1 w0.15: R192.1@57.679,50.581 58.3,50.581 58.614,50.267 59.411,50.267 59.436,50.292 59.477,50.251 U20.2@59.506,50.251
RS_422_2_PC104_RX_N: R177.1 R217.1 R224.1 | length 123.6
  Top_1 w0.134: 15.717,26.11 15.915,26.11 15.995,26.19 15.995,31.449 21.209,36.663 21.209,50.568 16.65,55.127 16.65,56.642 17.162,57.154 17.162,58.498 16.439,59.221 16.439,59.608 16.319,59.727 v1(16.319,59.799) ; v1(74.422,78.101) 74.494,78.101 74.613,77.982 75.082,77.982 75.161,78.06 75.161,78.088 75.369,78.296 R177.1@75.369,78.359
  SIGNAL_3 w0.1: v1(16.319,59.799) 16.319,59.877 16.449,60.007 16.449,60.305 14.365,62.389 14.365,73.675 23.116,82.426 52.534,82.426 53.995,80.965 70.643,80.965 73.637,77.971 74.213,77.971 74.343,78.101 v1(74.422,78.101)
  Bottom_6 w0.134: R217.1@14.801,26.565 14.938,26.428 14.938,26.192 15.017,26.113 15.327,26.113 15.449,26.235 v1(15.521,26.235) ; R224.1@14.801,59.309 14.949,59.161 14.949,58.947 15.028,58.868 15.908,58.868 16.439,59.399 16.439,59.608
RS_422_2_PC104_RX_P: R182.1 R216.1 R225.2 | length 124.3
  Top_1 w0.134: v1(15.53,25.725) 15.581,25.776 15.653,25.776 15.726,25.849 16.024,25.849 16.256,26.082 16.256,31.34 21.47,36.555 21.47,50.676 17.081,55.065 16.99,55.157 16.911,55.235 16.911,56.534 17.423,57.046 17.423,58.606 16.7,59.329 16.7,59.608 16.819,59.727 v1(16.819,59.799) ; v1(74.422,77.601) 74.494,77.601 74.613,77.72 75.082,77.72 75.161,77.642 75.161,77.614 75.369,77.406 R182.1@75.369,77.343
  SIGNAL_3 w0.1: v1(16.819,59.799) 16.819,59.877 16.689,60.007 16.689,60.404 14.605,62.488 14.605,73.575 23.215,82.186 52.434,82.186 53.895,80.725 70.543,80.725 73.537,77.731 74.213,77.731 74.343,77.601 v1(74.422,77.601)
  Bottom_6 w0.134: R216.1@14.801,25.4 14.938,25.537 14.938,25.773 15.017,25.852 15.331,25.852 15.458,25.725 v1(15.53,25.725) ; R225.2@14.801,58.166 14.949,58.314 14.949,58.528 15.028,58.607 16.016,58.607 16.7,59.291 16.7,59.608
RS_422_2_PC104_TX_N: R176.1 R219.1 | length 115.4
  Top_1 w0.134: v1(74.422,79.76) 74.494,79.76 74.613,79.879 75.082,79.879 75.161,79.801 75.161,79.773 75.369,79.565 R176.1@75.369,79.502
  SIGNAL_3 w0.1: v1(15.503,28.424) 15.422,28.424 15.292,28.294 14.336,28.294 13.695,28.935 13.695,33.422 12.888,34.229 12.888,51.262 13.921,52.295 13.921,73.813 22.916,82.808 52.767,82.808 54.147,81.427 70.814,81.427 72.351,79.89 74.213,79.89 74.343,79.76 v1(74.422,79.76)
  Bottom_6 w0.134: R219.1@14.801,28.702 14.801,28.639 15.009,28.431 15.009,28.403 15.107,28.305 15.312,28.305 15.431,28.424 v1(15.503,28.424)
RS_422_2_PC104_TX_P: R120.1 R218.1 | length 116.2
  Top_1 w0.134: v1(74.422,80.26) 74.494,80.26 74.613,80.141 75.082,80.141 75.161,80.219 75.161,80.247 75.369,80.455 R120.1@75.369,80.518
  SIGNAL_3 w0.1: v1(15.503,27.924) 15.424,27.924 15.294,28.054 14.237,28.054 13.455,28.836 13.455,33.322 12.648,34.13 12.648,51.362 13.681,52.395 13.681,73.912 22.816,83.048 52.866,83.048 54.247,81.667 70.913,81.667 72.45,80.13 74.213,80.13 74.343,80.26 v1(74.422,80.26)
  Bottom_6 w0.134: R218.1@14.801,27.686 14.801,27.749 15.009,27.957 15.009,27.965 15.088,28.044 15.312,28.044 15.431,27.924 v1(15.503,27.924)
RS_422_RX_N: R77.1 R177.2 R194.2 SB4.1 U20.10 | length 55.8
  Top_1 w0.134: U20.10@63.938,49.601 64.389,49.601 64.584,49.796 64.881,49.796 65.335,50.25 65.469,50.25 R194.2@65.78,49.938 ; R194.2@65.78,49.93 R194.2@65.78,49.938 ; R177.2@76.269,78.359 76.269,78.296 76.477,78.088 76.477,78.06 76.556,77.982 77.025,77.982 77.144,78.101 v1(77.216,78.101) ; 80.398,56.277 79.661,55.539 68.43,55.539 67.157,54.267 67.157,50.889 66.518,50.25 66.092,50.25 R194.2@65.78,49.938 ; v1@80.533,56.412 80.94,56.818 80.94,67.588 81.201,67.85 81.41,67.85 ; v1@81.741,67.662 81.99,67.662 R77.1@82.179,67.472
  SIGNAL_3 w0.1: v1(77.216,78.101) 77.295,78.101 77.425,77.971 79.089,77.971 79.959,77.101 79.959,74.304 82.663,71.6 82.663,70.703 82.663,68.255 82.268,67.86 81.81,67.86 81.68,67.73 v1(81.601,67.73)
  Bottom_6 w0.134: 80.669,56.547 80.823,56.702 86.014,56.702 86.093,56.623 SB4.1@86.093,55.88
  other v1: 80.618,56.328
RS_422_RX_P: R109.1 R182.2 R194.1 SB3.1 U20.11 | length 55.1
  Top_1 w0.134: U20.11@63.938,50.251 64.389,50.251 64.584,50.057 64.773,50.057 65.227,50.511 65.469,50.511 R194.1@65.78,50.822 ; R194.1@65.78,50.83 R194.1@65.78,50.822 ; R182.2@76.269,77.343 76.269,77.406 76.477,77.614 76.477,77.642 76.556,77.72 77.025,77.72 77.144,77.601 v1(77.216,77.601) ; 80.213,56.461 79.553,55.801 68.321,55.801 66.896,54.375 66.896,50.997 66.41,50.511 66.092,50.511 R194.1@65.78,50.822 ; v1@80.447,56.695 80.679,56.927 80.679,67.696 81.093,68.111 81.41,68.111 ; v1@81.742,68.299 81.99,68.299 R109.1@82.179,68.488
  SIGNAL_3 w0.1: v1(77.216,77.601) 77.295,77.601 77.425,77.731 78.99,77.731 79.719,77.002 79.719,74.205 82.423,71.501 82.423,68.354 82.169,68.1 81.81,68.1 81.68,68.23 v1(81.601,68.23)
  Bottom_6 w0.134: 80.484,56.732 80.715,56.963 86.014,56.963 86.093,57.042 SB3.1@86.093,57.785
  other v1: 80.264,56.681
RS_422_TX_N: R75.1 R176.2 R195.1 SB4.2 U20.9 | length 66.3
  Top_1 w0.134: U20.9@63.938,48.951 64.389,48.951 64.584,48.756 64.881,48.756 65.286,48.352 65.469,48.352 R195.1@65.78,48.663 ; R195.1@65.78,48.671 R195.1@65.78,48.663 ; R176.2@76.269,79.502 76.269,79.565 76.477,79.773 76.477,79.801 76.556,79.879 77.025,79.879 77.144,79.76 v1(77.216,79.76) ; 80.255,55.407 79.963,55.115 68.634,55.115 67.601,54.082 67.601,49.467 66.486,48.352 66.092,48.352 R195.1@65.78,48.663 ; 80.526,55.678 81.426,56.579 v1@81.426,64.45 ; 81.426,64.641 81.426,65.832 81.673,66.079 81.892,66.079 81.971,66.158 81.971,66.185 82.179,66.393 R75.1@82.179,66.456
  SIGNAL_3 w0.1: v1(77.216,79.76) 77.295,79.76 77.425,79.89 77.901,79.89 80.517,77.275 80.517,74.422 83.148,71.791 83.148,67.941 81.437,66.23 81.437,64.658 81.307,64.528 v1(81.307,64.45)
  Bottom_6 w0.134: 80.526,55.678 80.727,55.879 83.944,55.879 85.014,54.809 88.379,54.809 88.773,55.203 88.773,56.34 88.411,56.702 87.709,56.702 87.63,56.623 SB4.2@87.63,55.88
  other v1: 80.306,55.627
RS_422_TX_P: R53.1 R120.2 R195.2 SB3.2 U20.8 | length 67.4
  Top_1 w0.134: U20.8@63.938,48.301 64.389,48.301 64.584,48.495 64.773,48.495 65.177,48.091 65.469,48.091 R195.2@65.78,47.779 ; R195.2@65.78,47.771 R195.2@65.78,47.779 ; R120.2@76.269,80.518 76.269,80.455 76.477,80.247 76.477,80.219 76.556,80.141 77.025,80.141 77.144,80.26 v1(77.216,80.26) ; 80.44,55.223 80.071,54.854 68.742,54.854 67.862,53.973 67.862,49.358 66.594,48.091 66.092,48.091 R195.2@65.78,47.779 ; 80.71,55.493 81.687,56.47 v1@81.687,64.45 ; 81.687,64.641 81.687,65.724 81.781,65.818 81.892,65.818 81.971,65.739 81.971,65.712 82.179,65.504 R53.1@82.179,65.44
  SIGNAL_3 w0.1: v1(77.216,80.26) 77.295,80.26 77.425,80.13 78.001,80.13 80.757,77.374 80.757,74.522 83.388,71.891 83.388,67.841 81.677,66.131 81.677,64.658 81.807,64.528 v1(81.807,64.45)
  Bottom_6 w0.134: 80.71,55.493 80.835,55.618 83.836,55.618 84.906,54.548 88.487,54.548 89.034,55.095 89.034,56.448 88.519,56.963 87.709,56.963 87.63,57.042 SB3.2@87.63,57.785
  other v1: 80.659,55.274
SCL_EXP_CONNECTOR: J15.5 J15.6 R241.2 | length 6.5
  Top_1 w0.2: v1(29.364,7.204) v1@29.37,7.21 ; v1@29.37,10.181 v1(29.376,10.187)
  SIGNAL_3 w0.2: v1@29.37,7.21 v1@29.37,10.181
  Bottom_6 w0.127: v1(29.376,10.187) 29.39,10.173 30.398,10.173 R241.2@30.411,10.16
  Bottom_6 w0.2: J15.6@28.615,8.217 29.365,8.217 ; v1(29.364,7.204) 29.365,8.217 ; J15.5@30.115,8.217 29.365,8.217
SDA_EXP_CONNECTOR: J15.1 J15.2 R238.2 | length 4.3
  Bottom_6 w0.127: R238.2@34.359,10.16 35.023,10.16 35.36,9.823 35.36,8.24 35.337,8.217 ; J15.2@34.615,8.217 35.337,8.217 ; J15.1@36.115,8.217 35.337,8.217
SDMMC0_CAL: R24.2 U3.R16 | length 1.5
  Top_1 w0.1: R24.2@40.203,39.974 v1(40.203,40.337)
  Bottom_6 w0.1: U3.R16@39.228,40.662 39.553,40.337 v1(40.203,40.337)
SDMMC0_CLK: R31.2 R140.2 U5.P6@35.4,21.273 | length 17.2
  Top_1 w0.125: R140.2@35.425,21.273 35.425,21.233 36.175,20.483 v2(36.175,20.479) 37.403,20.479 37.862,20.939 37.862,22.082 v1(37.338,22.606)
  Bottom_6 w0.125: U5.P6@35.4,21.273 35.4,21.264 36.175,20.488 v2(36.175,20.479) v2@36.175,20.456 ; R31.2@36.703,32.123 36.703,29.782 38.989,27.496 38.989,25.146 37.338,23.495 v1(37.338,22.606)
SDMMC0_CMD: R32.2 R141.2 U5.P5@35.4,22.273 | length 14.7
  Top_1 w0.125: v2@34.963,22.723 34.963,22.717 35.406,22.273 R141.2@35.413,22.273 ; R141.2@35.413,22.298 36.229,23.114 v1(38.227,23.114)
  Bottom_6 w0.125: v2(34.9,22.773) U5.P5@35.4,22.273 ; R32.2@37.338,32.123 37.338,29.488 39.214,27.612 39.214,25.053 38.227,24.066 v1(38.227,23.114)
SDMMC0_D0: R35.2 R132.2 U5.K2@31.4,25.273 | length 11.6
  Top_1 w0.125: R132.2@31.375,25.273 31.288,25.435 v2(30.998,25.918) 33.096,28.017 v1(36.072,28.017)
  Bottom_6 w0.125: v2(30.998,25.918) U5.K2@31.4,25.273 ; R35.2@36.068,32.123 36.07,32.12 36.07,28.019 v1(36.072,28.017)
SDMMC0_D1: R37.2 R133.2 U5.N2@34.4,25.273 | length 13.5
  Top_1 w0.125: R133.2@34.444,25.257 34.444,25.319 33.998,25.766 v2(33.96,25.766) 33.96,25.832 34.264,26.136 36.607,26.136 v1(37.594,25.148)
  Bottom_6 w0.125: v2(33.96,25.766) 33.96,25.74 34.4,25.299 U5.N2@34.4,25.273 ; R37.2@35.433,32.123 35.433,27.31 v1(37.594,25.148)
SDMMC0_D2: R46.2 R134.2 U5.K3@31.4,24.273 | length 15.1
  Top_1 w0.125: R134.2@31.426,24.273 31.563,24.111 v2(31.9,23.773) 32.345,24.218 32.345,26.666 33.231,27.551 37.203,27.551 38.675,29.023 38.675,30.173 v1@39.236,30.734
  Bottom_6 w0.125: U5.K3@31.4,24.273 v2(31.9,23.773) ; v1(39.243,30.734) R46.2@39.243,32.123
SDMMC0_D3: R48.2 R135.2 U5.N3@34.4,24.273 | length 15.2
  Top_1 w0.125: v2@33.95,23.811 34.413,24.273 R135.2@34.438,24.273 ; R135.2@34.513,24.248 34.513,24.223 35.18,23.555 37.787,23.555 40.005,25.773 v1(40.005,27.686)
  Bottom_6 w0.125: v2(33.9,23.773) U5.N3@34.4,24.273 ; v1(40.005,27.686) 40.005,28.829 41.783,30.607 R48.2@41.783,32.123
SDMMC0_D4: R38.2 R136.2 U5.N8@34.4,19.273 | length 20.5
  Top_1 w0.125: R136.2@32.943,18.773 32.955,18.784 33.913,18.784 v1(33.924,18.796) 35.067,17.653 35.687,17.653 38.269,20.235 38.269,22.304 39.37,23.405 v1(39.37,24.003)
  Bottom_6 w0.125: v1(33.924,18.796) U5.N8@34.4,19.272 ; R38.2@37.973,32.123 37.973,31.509 37.968,31.505 37.968,29.176 39.439,27.706 39.439,24.146 39.37,24.077 v1(39.37,24.003)
SDMMC0_D5: R39.2 R137.2 U5.K8@31.4,19.273 | length 20.3
  Top_1 w0.125: v1(30.861,19.773) 30.607,20.61 R137.2@30.469,20.773 30.469,20.798 31.38,21.709 31.38,22.946 31.579,23.145 32.628,23.145 33.053,23.57 33.053,26.182 33.78,26.909 37.93,26.909 39.639,28.618 ccw(c39.55,28.706) 39.675,28.706 39.675,30.97 39.415,31.231 39.415,31.672 39.866,32.123 R39.2@39.878,32.123
  Bottom_6 w0.125: v1(30.861,19.773) 30.881,19.773 31.381,19.273 U5.K8@31.4,19.273
SDMMC0_D6: R41.2 R138.2 U5.N9@34.4,18.273 | length 22.8
  Top_1 w0.125: v1(33.924,17.773) 33.946,17.752 33.946,17.039 R138.2@33.967,17.018 33.967,16.601 34.159,16.409 35.281,16.409 38.862,19.99 v1(38.862,20.574)
  Bottom_6 w0.125: v1(33.924,17.773) 33.924,17.785 34.4,18.261 U5.N9@34.4,18.273 ; R41.2@34.798,32.123 34.798,27.432 36.576,25.654 36.576,21.745 37.162,21.158 38.278,21.158 v1(38.862,20.574)
SDMMC0_D7: R44.2 R139.2 U5.K9@31.4,18.273 | length 25.9
  Top_1 w0.125: v1(30.861,17.773) 30.851,17.763 30.851,17.086 R139.2@30.919,17.018 ; R139.2@30.919,17.018 30.919,15.875 31.427,15.367 34.918,15.367 40.4,20.849 v1(40.513,30.607)
  Bottom_6 w0.125: v1(30.861,17.773) 30.88,17.773 31.38,18.273 U5.K9@31.4,18.273 ; v1(40.513,30.607) R44.2@40.513,32.123
SDMMC0_DS: R50.2 U5.K5@31.4,22.273 | length 18.8
  Top_1 w0.125: v1(30.881,21.761) 30.881,22.914 31.336,23.37 32.239,23.37 32.695,23.826 32.695,26.41 33.474,27.189 37.603,27.189 39.243,28.829 v1(39.243,29.464)
  Bottom_6 w0.125: v1(30.881,21.761) 30.884,21.761 31.396,22.273 U5.K5@31.4,22.273 ; v1(39.243,29.464) 40.09,29.464 41.148,30.522 R50.2@41.148,32.123
SDMMC0_NRST: R34.2 R142.2 U5.M5@33.4,22.273 | length 16.7
  Top_1 w0.125: R142.2@32.807,21.77 32.913,21.877 v1(32.913,22.708) ; v1@32.913,22.719 33.387,23.192 33.387,25.971 34.061,26.645 38.339,26.645 39.994,28.3 ccw(c39.906,28.388) 40.031,28.388 40.031,30.863 cw(c40.156,30.863) 40.067,30.95 40.476,31.36 ccw(c40.388,31.448) 40.513,31.448 R34.2@40.513,32.123
  Bottom_6 w0.125: v1(32.913,22.708) 32.939,22.708 33.374,22.273 U5.M5@33.4,22.273
SDMMC1_CAL: R25.2 U3.B13 | length 6.4
  Bottom_6 w0.1: R25.2@38.505,53.84 38.517,53.84 39.217,53.14 39.66,53.14 41.503,51.297 41.503,49.437 U3.B13@41.178,49.112
SDMMC1_CLK: R64.2 R147.2 U6.P6@33.368,65.564 | length 14.7
  Top_1 w0.125: R147.2@33.393,65.564 33.393,65.524 34.143,64.774 v2(34.143,64.77) 35.113,63.8 35.113,58.613 35.687,58.039 v1(37.084,58.039)
  Bottom_6 w0.125: U6.P6@33.368,65.564 33.368,65.555 34.143,64.779 v2(34.143,64.77) ; v1(37.084,58.039) 37.084,58.037 37.293,57.828 R64.2@37.293,54.364
SDMMC1_CMD: R62.2 R148.2 U6.P5@33.368,66.564 | length 18.4
  Top_1 w0.125: v2@32.89,67.065 v2@32.936,67.019 ; R148.2@33.374,66.564 32.931,67.008 32.931,67.014 33.269,67.352 35.391,67.352 37.338,65.405 37.338,59.69 v1(36.322,58.674)
  Bottom_6 w0.125: v2(32.89,67.065) 32.89,67.054 33.368,66.576 U6.P5@33.368,66.564 ; v1(36.322,58.674) 36.322,57.831 36.703,57.45 R62.2@36.703,54.364
SDMMC1_D0: R66.2 R143.2 U6.K2@29.368,69.564 | length 20.1
  Top_1 w0.125: v2(28.966,70.209) 29.256,69.726 R143.2@29.343,69.564 ; R143.2@29.394,69.564 30.258,69.564 30.873,68.949 30.873,68.187 31.495,67.565 32.096,67.565 32.527,67.134 32.527,59.802 v1(33.655,58.674)
  Bottom_6 w0.125: v2(28.966,70.209) U6.K2@29.368,69.564 ; v1(33.655,58.674) 34.151,58.178 34.151,55.69 35.39,54.452 35.39,54.443 35.465,54.368 R66.2@35.474,54.368
SDMMC1_D1: R68.2 R144.2 U6.N2@32.368,69.564 | length 23.4
  Top_1 w0.125: v2(31.928,70.057) 31.966,70.057 32.412,69.61 R144.2@32.412,69.548 ; R144.2@32.487,69.548 32.487,69.573 33.526,70.612 36.195,70.612 38.862,67.945 38.862,58.2 v1(37.851,57.189)
  Bottom_6 w0.125: v2(31.928,70.057) 31.928,70.031 32.368,69.59 U6.N2@32.368,69.564 ; v1(37.851,57.189) 37.872,57.168 37.872,54.386 R68.2@37.893,54.364
SDMMC1_D2: R70.2 R145.2 U6.K3@29.368,68.564 | length 21.4
  Top_1 w0.125: R145.2@29.394,68.564 29.865,68.092 28.638,66.865 28.638,61.883 29.234,61.287 30.733,61.287 31.369,60.651 31.369,58.576 31.906,58.039 v1(34.925,58.039) ; v2@29.853,68.08 v2(29.868,68.064)
  Bottom_6 w0.125: U6.K3@29.368,68.564 v2(29.868,68.064) ; v1(34.925,58.039) 34.925,55.53 36.009,54.446 36.009,54.437 36.084,54.363 R70.2@36.093,54.363
SDMMC1_D3: R71.2 R146.2 U6.N3@32.368,68.564 | length 20.5
  Top_1 w0.125: v2@31.918,68.102 32.381,68.564 R146.2@32.406,68.564 ; R146.2@32.481,68.539 32.481,68.514 32.955,68.04 36.613,68.04 38.354,66.299 38.354,58.262 v1(38.355,58.26)
  Bottom_6 w0.125: v2(31.868,68.064) U6.N3@32.368,68.564 ; v1(38.355,58.26) 38.345,58.25 38.345,55.771 39.116,55 R71.2@39.116,54.373
SDMMC1_NRST: R60.2 R149.2 U6.M5@31.368,66.564 | length 14.2
  Top_1 w0.125: R149.2@31.342,66.518 31.358,66.518 31.595,66.281 31.603,66.281 v2(31.831,66.052) 32.253,65.631 32.253,58.703 v1(32.269,58.687)
  Bottom_6 w0.125: U6.M5@31.368,66.564 31.368,66.54 31.831,66.076 v2(31.831,66.052) ; v1@32.269,58.677 33.358,57.588 33.358,55.665 34.659,54.364 R60.2@34.671,54.364
SDMMC2_CAL: R26.2 U3.E14 | length 3
  Top_1 w0.1: R26.2@41.178,49.175 41.181,49.171 41.181,48.712 v1(41.207,48.686)
  Bottom_6 w0.1: U3.E14@40.528,47.162 40.771,47.405 41.313,47.405 41.623,47.715 41.623,48.325 41.262,48.686 v1(41.207,48.686)
SDMMC2_CD: J2.P9 R79.2 R156.1 | length 54.3
  Top_1 w0.125: J2.P9@25.297,77.546 25.28,77.529 v1(24.55,77.529) 24.55,78.998 29.2,83.647 40.569,83.647 44.948,79.268 44.948,72.66 41.539,69.251 41.539,57.18 41.06,56.701 41.06,54.403 R79.2@41.021,54.364
  Bottom_6 w0.125: v1(24.55,77.529) 25.746,77.645 R156.1@25.908,77.782
SDMMC2_CK: CR1.3 J2.P5 R107.2 R154.1 | length 43.1
  Top_1 w0.125: v1(31.457,79.478) J2.P5@31.457,80.226 31.648,80.417 31.648,80.676 32.801,81.828 37.283,81.828 37.924,81.188 37.924,77.82 39.394,76.35 41.656,76.35 42.253,75.753 CR1.3@42.577,75.753 42.743,75.587 43.084,75.587 43.504,75.167 43.504,73.168 40.055,69.719 40.055,57.683 37.211,54.839 R107.2@37.211,54.364
  Bottom_6 w0.125: v1(31.457,79.478) 32.386,78.819 R154.1@32.549,78.682
SDMMC2_CMD: CR2.6 J2.P3 R106.2 R155.1 | length 46.2
  Top_1 w0.125: v1(29.257,79.478) J2.P3@29.257,80.226 29.448,80.417 29.448,80.701 31.043,82.296 37.592,82.296 38.363,81.525 38.363,78.655 38.593,78.425 CR2.6@39.973,78.425 39.973,77.375 40.341,77.007 42.881,77.007 43.831,76.057 43.831,73 40.426,69.594 40.426,57.502 37.846,54.922 R106.2@37.846,54.364
  Bottom_6 w0.125: R155.1@29.257,78.724 v1(29.257,79.478)
SDMMC2_D0: CR1.4 J2.P7 R108.2 R150.1 | length 37.1
  Top_1 w0.125: v1(33.657,79.478) J2.P7@33.657,80.226 33.657,80.467 34.647,81.457 37.069,81.457 37.474,81.053 37.474,77.33 39.051,75.753 CR1.4@39.973,75.753 40.139,75.587 40.487,75.587 41.285,74.789 41.285,71.44 39.684,69.839 39.684,57.853 36.576,54.746 R108.2@36.576,54.364
  Bottom_6 w0.125: R150.1@33.655,78.682 33.657,78.819 v1(33.657,79.478)
SDMMC2_D1: CR1.6 J2.P8 R110.2 R151.1 | length 34.3
  Top_1 w0.125: v1(34.757,79.478) J2.P8@34.757,80.226 34.757,80.467 35.392,81.102 36.842,81.102 37.055,80.889 37.055,76.983 38.446,75.592 38.446,74.37 38.963,73.853 CR1.6@39.754,73.853 ; R110.2@35.941,54.364 35.955,54.379 35.955,54.612 39.313,57.97 39.313,73.412 CR1.6@39.754,73.853 ; CR1.6@39.973,73.853 39.884,73.853 CR1.6@39.754,73.853
  Bottom_6 w0.125: v1(34.757,79.478) 34.757,78.848 R151.1@34.762,78.711
SDMMC2_D2: CR2.3 J2.P1 R112.2 R152.1 | length 48.9
  Top_1 w0.125: v1(27.057,79.478) J2.P1@27.057,80.226 27.057,80.467 29.757,83.167 39.411,83.167 42.253,80.325 CR2.3@42.577,80.325 42.901,80.325 43.067,80.159 43.067,80.154 44.571,78.649 44.571,72.793 41.168,69.389 41.168,57.425 39.116,55.373 R112.2@39.116,54.364
  Bottom_6 w0.1: R152.1@27.015,78.682 R152.1@27.057,78.724
  Bottom_6 w0.125: R152.1@27.057,78.724 v1(27.057,79.478)
SDMMC2_D3: CR2.4 J2.P2 R76.2 R153.1 | length 47.5
  Top_1 w0.125: v1(28.157,79.478) J2.P2@28.157,80.226 28.157,80.467 28.348,80.658 30.424,82.734 37.808,82.734 38.849,81.693 38.849,80.476 39,80.325 CR2.4@39.973,80.325 40.297,80.325 40.463,80.159 41.148,79.474 41.148,77.937 41.643,77.443 43.408,77.443 44.196,76.654 44.196,72.905 40.797,69.506 40.797,57.422 39.133,55.758 38.481,55.106 R76.2@38.481,54.364
  Bottom_6 w0.125: R153.1@28.157,78.724 v1(28.157,79.478)
SENSE1_N: R14.4 U2.12 | length 9.7
  Top_1 w0.134: 64.435,61.658 64.435,60.865 ccw(c64.83,60.865) 64.55,60.586 64.947,60.189 ccw(c65.226,60.469) 65.226,60.074 67.049,60.074 cw(c67.049,59.94) 67.143,60.035 67.159,60.02 cw(c67.064,59.925) 67.198,59.925 R14.4@67.198,58.724
  Bottom_6 w0.134: U2.12@62.387,62.192 62.387,62.409 62.192,62.603 62.192,62.896 cw(c62.326,62.896) 62.232,62.991 62.447,63.207 cw(c62.542,63.112) 62.542,63.246 64.038,63.246 cw(c64.038,63.112) 64.133,63.207 64.396,62.944 cw(c64.301,62.849) 64.435,62.849 64.435,62.04 64.316,61.921 v1(64.316,61.849)
SENSE1_P: R14.3 U2.11 | length 10.1
  Top_1 w0.134: 64.696,61.658 64.696,60.865 ccw(c64.83,60.865) 64.735,60.77 65.131,60.374 ccw(c65.226,60.469) 65.226,60.335 67.011,60.335 ccw(c67.011,60.469) 67.105,60.374 67.159,60.428 ccw(c67.064,60.522) 67.198,60.522 R14.3@67.198,61.724
  Bottom_6 w0.134: U2.11@61.737,62.192 61.737,62.409 61.931,62.603 61.931,62.896 cw(c62.326,62.896) 62.047,63.176 62.264,63.393 cw(c62.542,63.112) 62.542,63.507 64.038,63.507 cw(c64.038,63.112) 64.317,63.392 64.581,63.128 cw(c64.301,62.849) 64.696,62.849 64.696,62.04 64.816,61.921 v1(64.816,61.849)